# Altium PCB PCB1.PcbDoc
Units mil, origin at the board's own origin, x right, y up, seen from the top; angles counter-clockwise.
Board outline 6000 x 4000 mil, 2 copper layers (Top Layer, Bottom Layer); 1 components, 0 nets, 402 pads, 0 vias.
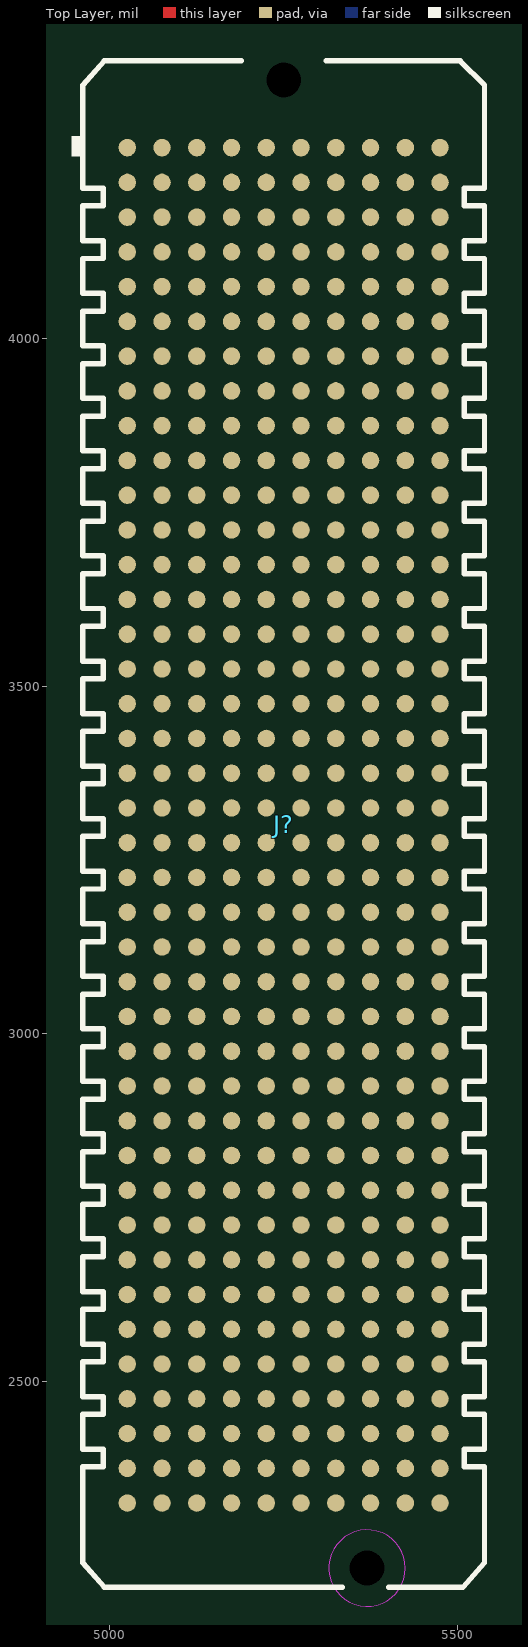
[diagram p0: Top Layer view]
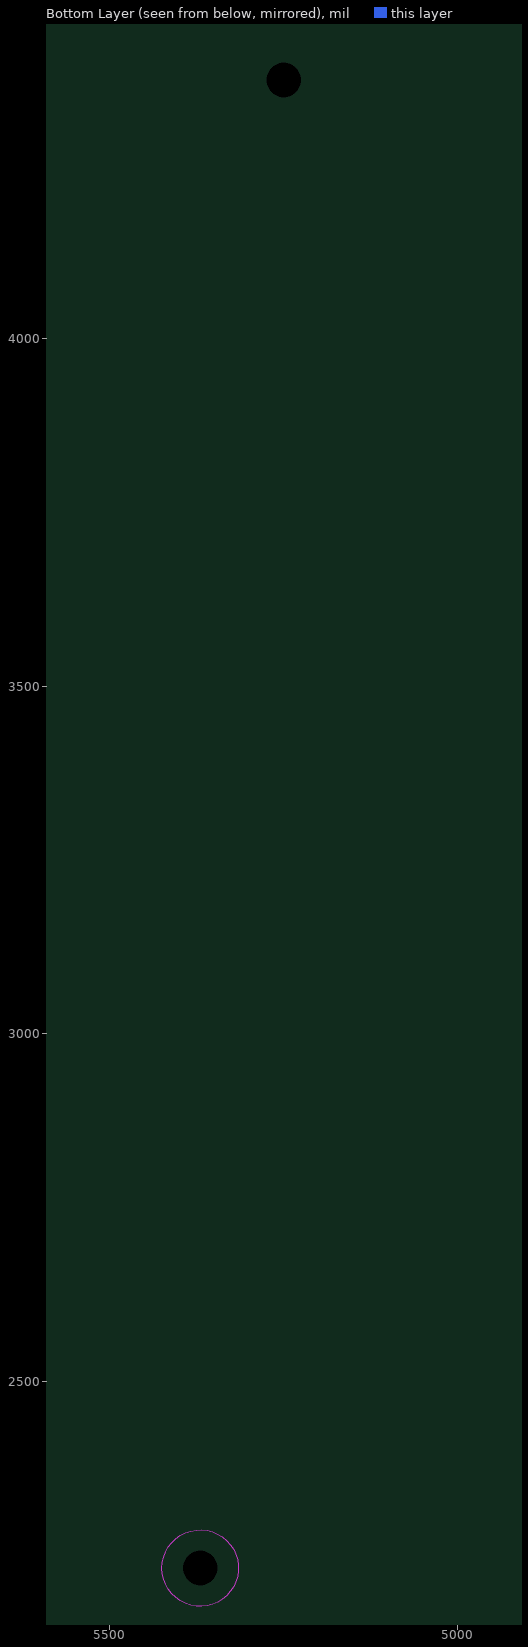
[diagram p1: Bottom Layer view, seen from below]

## Layer stack, top to bottom
Top Solder: solder mask 0.4, Solder Resist, Dk 3.5
Top Layer: signal copper 1.4
Dielectric 1: dielectric 12.6, FR-4, Dk 4.8
Bottom Layer: signal copper 1.4
Bottom Solder: solder mask 0.4, Solder Resist, Dk 3.5

## Board outline
1000,1000 7000,1000 7000,5000 1000,5000

## Design rules (kind name [scope] priority, off if disabled: settings)
Clearance [All] p1: gap=10 ignorepadtopadclearanceinfootprint=FALSE except(0: Arc-Hole Track-Hole SMDPad-Hole THPad-Hole Via-Hole Fill-Hole Poly-Hole Region-Hole Text-Hole)
PolygonConnect [All] p1: connectstyle=Relief reliefconductorwidth=10 reliefentries=4 polygonreliefangle="90 Angle" airgapwidth=10
RoutingVias [All] p1: holewidth=28 width=50 viastyle="Through Hole" minholewidth=28 minwidth=50 maxholewidth=28 maxwidth=50
SolderMaskExpansion [All] p1: expansion=4
Width [All] p1: maxlimit=10 minlimit=10 preferedwidth=10
30 further rules are at their usual default settings.

## Components (designator, comment, footprint, x,y, rotation, side; value= is the part's Value field where it differs from the comment)
J? "ASP-134602-01" SAMTEC_ASP-134602-01 5250,3301.94 r0 top

## Footprints (in the part's own frame and the unit in brackets; to place one, negate y for a bottom-side part, rotate by r counter-clockwise, add the part's x,y. Pads: shape width x height; smd on the part's side, far side on the other; paste and mask are expansions set on the pad)
SAMTEC_ASP-134602-01 [mm] "Connector,  Male, 1.27 mm, 40x4, SMD"
  round 0.635 hole 1.27 unplated mask+0.572: 401(0,27.191) 402(3.048,-27.191)
  round 0.64 smd paste+0.125 mask+0.05: A1(-5.715,24.716) A2(-5.715,23.446) A3(-5.715,22.176) A4(-5.715,20.906) A5(-5.715,19.636) A6(-5.715,18.366) A7(-5.715,17.096) A8(-5.715,15.826) A9(-5.715,14.556) A10(-5.715,13.286) A11(-5.715,12.016) A12(-5.715,10.746) A13(-5.715,9.476) A14(-5.715,8.206) A15(-5.715,6.936) A16(-5.715,5.666) A17(-5.715,4.396) A18(-5.715,3.126) A19(-5.715,1.856) A20(-5.715,0.586) A21(-5.715,-0.684) A22(-5.715,-1.954) A23(-5.715,-3.224) A24(-5.715,-4.494) A25(-5.715,-5.764) A26(-5.715,-7.034) A27(-5.715,-8.304) A28(-5.715,-9.574) A29(-5.715,-10.844) A30(-5.715,-12.114) A31(-5.715,-13.384) A32(-5.715,-14.654) A33(-5.715,-15.924) A34(-5.715,-17.194) A35(-5.715,-18.464) A36(-5.715,-19.734) A37(-5.715,-21.004) A38(-5.715,-22.274) A39(-5.715,-23.544) A40(-5.715,-24.814) B1(-4.445,24.716) B2(-4.445,23.446) B3(-4.445,22.176) B4(-4.445,20.906) B5(-4.445,19.636) B6(-4.445,18.366) B7(-4.445,17.096) B8(-4.445,15.826) B9(-4.445,14.556) B10(-4.445,13.286) B11(-4.445,12.016) B12(-4.445,10.746) B13(-4.445,9.476) B14(-4.445,8.206) B15(-4.445,6.936) B16(-4.445,5.666) B17(-4.445,4.396) B18(-4.445,3.126) B19(-4.445,1.856) B20(-4.445,0.586) B21(-4.445,-0.684) B22(-4.445,-1.954) B23(-4.445,-3.224) B24(-4.445,-4.494) B25(-4.445,-5.764) B26(-4.445,-7.034) B27(-4.445,-8.304) B28(-4.445,-9.574) B29(-4.445,-10.844) B30(-4.445,-12.114) B31(-4.445,-13.384) B32(-4.445,-14.654) B33(-4.445,-15.924) B34(-4.445,-17.194) B35(-4.445,-18.464) B36(-4.445,-19.734) B37(-4.445,-21.004) B38(-4.445,-22.274) B39(-4.445,-23.544) B40(-4.445,-24.814) C1(-3.175,24.716) C2(-3.175,23.446) C3(-3.175,22.176) C4(-3.175,20.906) C5(-3.175,19.636) C6(-3.175,18.366) C7(-3.175,17.096) C8(-3.175,15.826) C9(-3.175,14.556) C10(-3.175,13.286) C11(-3.175,12.016) C12(-3.175,10.746) C13(-3.175,9.476) C14(-3.175,8.206) C15(-3.175,6.936) C16(-3.175,5.666) C17(-3.175,4.396) C18(-3.175,3.126) C19(-3.175,1.856) C20(-3.175,0.586) C21(-3.175,-0.684) C22(-3.175,-1.954) C23(-3.175,-3.224) C24(-3.175,-4.494) C25(-3.175,-5.764) C26(-3.175,-7.034) C27(-3.175,-8.304) C28(-3.175,-9.574) C29(-3.175,-10.844) C30(-3.175,-12.114) C31(-3.175,-13.384) C32(-3.175,-14.654) C33(-3.175,-15.924) C34(-3.175,-17.194) C35(-3.175,-18.464) C36(-3.175,-19.734) C37(-3.175,-21.004) C38(-3.175,-22.274) C39(-3.175,-23.544) C40(-3.175,-24.814) D1(-1.905,24.716) D2(-1.905,23.446) D3(-1.905,22.176) D4(-1.905,20.906) D5(-1.905,19.636) D6(-1.905,18.366) D7(-1.905,17.096) D8(-1.905,15.826) D9(-1.905,14.556) D10(-1.905,13.286) D11(-1.905,12.016) D12(-1.905,10.746) D13(-1.905,9.476) D14(-1.905,8.206) D15(-1.905,6.936) D16(-1.905,5.666) D17(-1.905,4.396) D18(-1.905,3.126) D19(-1.905,1.856) D20(-1.905,0.586) D21(-1.905,-0.684) D22(-1.905,-1.954) D23(-1.905,-3.224) D24(-1.905,-4.494) D25(-1.905,-5.764) D26(-1.905,-7.034) D27(-1.905,-8.304) D28(-1.905,-9.574) D29(-1.905,-10.844) D30(-1.905,-12.114) D31(-1.905,-13.384) D32(-1.905,-14.654) D33(-1.905,-15.924) D34(-1.905,-17.194) D35(-1.905,-18.464) D36(-1.905,-19.734) D37(-1.905,-21.004) D38(-1.905,-22.274) D39(-1.905,-23.544) D40(-1.905,-24.814) E1(-0.635,24.716) E2(-0.635,23.446) E3(-0.635,22.176) E4(-0.635,20.906) E5(-0.635,19.636) E6(-0.635,18.366) E7(-0.635,17.096) E8(-0.635,15.826) E9(-0.635,14.556) E10(-0.635,13.286) E11(-0.635,12.016) E12(-0.635,10.746) E13(-0.635,9.476) E14(-0.635,8.206) E15(-0.635,6.936) E16(-0.635,5.666) E17(-0.635,4.396) E18(-0.635,3.126) E19(-0.635,1.856) E20(-0.635,0.586) E21(-0.635,-0.684) E22(-0.635,-1.954) E23(-0.635,-3.224) E24(-0.635,-4.494) E25(-0.635,-5.764) E26(-0.635,-7.034) E27(-0.635,-8.304) E28(-0.635,-9.574) E29(-0.635,-10.844) E30(-0.635,-12.114) E31(-0.635,-13.384) E32(-0.635,-14.654) E33(-0.635,-15.924) E34(-0.635,-17.194) E35(-0.635,-18.464) E36(-0.635,-19.734) E37(-0.635,-21.004) E38(-0.635,-22.274) E39(-0.635,-23.544) E40(-0.635,-24.814) F1(0.635,24.716) F2(0.635,23.446) F3(0.635,22.176) F4(0.635,20.906) F5(0.635,19.636) F6(0.635,18.366) F7(0.635,17.096) F8(0.635,15.826) F9(0.635,14.556) F10(0.635,13.286) F11(0.635,12.016) F12(0.635,10.746) F13(0.635,9.476) F14(0.635,8.206) F15(0.635,6.936) F16(0.635,5.666) F17(0.635,4.396) F18(0.635,3.126) F19(0.635,1.856) F20(0.635,0.586) F21(0.635,-0.684) F22(0.635,-1.954) F23(0.635,-3.224) F24(0.635,-4.494) F25(0.635,-5.764) F26(0.635,-7.034) F27(0.635,-8.304) F28(0.635,-9.574) F29(0.635,-10.844) F30(0.635,-12.114) F31(0.635,-13.384) F32(0.635,-14.654) F33(0.635,-15.924) F34(0.635,-17.194) F35(0.635,-18.464) F36(0.635,-19.734) F37(0.635,-21.004) F38(0.635,-22.274) F39(0.635,-23.544) F40(0.635,-24.814) G1(1.905,24.716) G2(1.905,23.446) G3(1.905,22.176) G4(1.905,20.906) G5(1.905,19.636) G6(1.905,18.366) G7(1.905,17.096) G8(1.905,15.826) G9(1.905,14.556) G10(1.905,13.286) G11(1.905,12.016) G12(1.905,10.746) G13(1.905,9.476) G14(1.905,8.206) G15(1.905,6.936) G16(1.905,5.666) G17(1.905,4.396) G18(1.905,3.126) G19(1.905,1.856) G20(1.905,0.586) G21(1.905,-0.684) G22(1.905,-1.954) G23(1.905,-3.224) G24(1.905,-4.494) G25(1.905,-5.764) G26(1.905,-7.034) G27(1.905,-8.304) G28(1.905,-9.574) G29(1.905,-10.844) G30(1.905,-12.114) G31(1.905,-13.384) G32(1.905,-14.654) G33(1.905,-15.924) G34(1.905,-17.194) G35(1.905,-18.464) G36(1.905,-19.734) G37(1.905,-21.004) G38(1.905,-22.274) G39(1.905,-23.544) G40(1.905,-24.814) H1(3.175,24.716) H2(3.175,23.446) H3(3.175,22.176) H4(3.175,20.906) H5(3.175,19.636) H6(3.175,18.366) H7(3.175,17.096) H8(3.175,15.826) H9(3.175,14.556) H10(3.175,13.286) H11(3.175,12.016) H12(3.175,10.746) H13(3.175,9.476) H14(3.175,8.206) H15(3.175,6.936) H16(3.175,5.666) H17(3.175,4.396) H18(3.175,3.126) H19(3.175,1.856) H20(3.175,0.586) H21(3.175,-0.684) H22(3.175,-1.954) H23(3.175,-3.224) H24(3.175,-4.494) H25(3.175,-5.764) H26(3.175,-7.034) H27(3.175,-8.304) H28(3.175,-9.574) H29(3.175,-10.844) H30(3.175,-12.114) H31(3.175,-13.384) H32(3.175,-14.654) H33(3.175,-15.924) H34(3.175,-17.194) H35(3.175,-18.464) H36(3.175,-19.734) H37(3.175,-21.004) H38(3.175,-22.274) H39(3.175,-23.544) H40(3.175,-24.814) J1(4.445,24.716) J2(4.445,23.446) J3(4.445,22.176) J4(4.445,20.906) J5(4.445,19.636) J6(4.445,18.366) J7(4.445,17.096) J8(4.445,15.826) J9(4.445,14.556) J10(4.445,13.286) J11(4.445,12.016) J12(4.445,10.746) J13(4.445,9.476) J14(4.445,8.206) J15(4.445,6.936) J16(4.445,5.666) J17(4.445,4.396) J18(4.445,3.126) J19(4.445,1.856) J20(4.445,0.586) J21(4.445,-0.684) J22(4.445,-1.954) J23(4.445,-3.224) J24(4.445,-4.494) J25(4.445,-5.764) J26(4.445,-7.034) J27(4.445,-8.304) J28(4.445,-9.574) J29(4.445,-10.844) J30(4.445,-12.114) J31(4.445,-13.384) J32(4.445,-14.654) J33(4.445,-15.924) J34(4.445,-17.194) J35(4.445,-18.464) J36(4.445,-19.734) J37(4.445,-21.004) J38(4.445,-22.274) J39(4.445,-23.544) J40(4.445,-24.814) K1(5.715,24.716) K2(5.715,23.446) K3(5.715,22.176) K4(5.715,20.906) K5(5.715,19.636) K6(5.715,18.366) K7(5.715,17.096) K8(5.715,15.826) K9(5.715,14.556) K10(5.715,13.286) K11(5.715,12.016) K12(5.715,10.746) K13(5.715,9.476) K14(5.715,8.206) K15(5.715,6.936) K16(5.715,5.666) K17(5.715,4.396) K18(5.715,3.126) K19(5.715,1.856) K20(5.715,0.586) K21(5.715,-0.684) K22(5.715,-1.954) K23(5.715,-3.224) K24(5.715,-4.494) K25(5.715,-5.764) K26(5.715,-7.034) K27(5.715,-8.304) K28(5.715,-9.574) K29(5.715,-10.844) K30(5.715,-12.114) K31(5.715,-13.384) K32(5.715,-14.654) K33(5.715,-15.924) K34(5.715,-17.194) K35(5.715,-18.464) K36(5.715,-19.734) K37(5.715,-21.004) K38(5.715,-22.274) K39(5.715,-23.544) K40(5.715,-24.814)
  Keep-Out Layer circle w0: c3.05,-27.19 r1.397
  silkscreen extent -7.75,-27.89 7.34,27.89, body extent -7.34,-27.89 7.34,28.78, height 5.61

## Part data
J?: "Connector, Male, 1.27 mm, 40x4, SMD", Manufacturer=Samtec, Supplier Part Number 1=SAM8731-ND, ComponentLink1Description="Datasheet Link", ComponentLink1URL=http://www.samtec.com/documents/webfiles/Cpdf/ASP-134602-01-mkt.pdf, Component Type=Standard, CompType=Connector, LatestRevisionDate=2015-05-09, MountType=SMT, PackageReference="Connector, Male, 1.27 mm, 40x4, SMD", Part Number=ASP-134602-01, PartNumber=ASP-134602-01, Pin Count=400, Publisher="Texas Instruments", RoHS=Y, Supplier 1=Digi-Key, SymbolCreator=Altium, SymbolVersion=2014-08-21, U/M=EA

## Nets (pads, with @x,y where several pads share a name; then routed paths per layer and width w, separated by ;. In a path a pad name is that pad's centre, name@x,y a point inside that pad or via, vN(x,y) a via of type N, cw(c..) or ccw(c..) an arc to the next point about the centre after c; other vN are vias at no path point)
pads on no net: J?.401 J?.402 J?.A1 J?.A2 J?.A3 J?.A4 J?.A5 J?.A6 J?.A7 J?.A8 J?.A9 J?.A10 J?.A11 J?.A12 J?.A13 J?.A14 J?.A15 J?.A16 J?.A17 J?.A18 J?.A19 J?.A20 J?.A21 J?.A22 J?.A23 J?.A24 J?.A25 J?.A26 J?.A27 J?.A28 J?.A29 J?.A30 J?.A31 J?.A32 J?.A33 J?.A34 J?.A35 J?.A36 J?.A37 J?.A38 J?.A39 J?.A40 J?.B1 J?.B2 J?.B3 J?.B4 J?.B5 J?.B6 J?.B7 J?.B8 J?.B9 J?.B10 J?.B11 J?.B12 J?.B13 J?.B14 J?.B15 J?.B16 J?.B17 J?.B18 J?.B19 J?.B20 J?.B21 J?.B22 J?.B23 J?.B24 J?.B25 J?.B26 J?.B27 J?.B28 J?.B29 J?.B30 J?.B31 J?.B32 J?.B33 J?.B34 J?.B35 J?.B36 J?.B37 J?.B38 J?.B39 J?.B40 J?.C1 J?.C2 J?.C3 J?.C4 J?.C5 J?.C6 J?.C7 J?.C8 J?.C9 J?.C10 J?.C11 J?.C12 J?.C13 J?.C14 J?.C15 J?.C16 J?.C17 J?.C18 J?.C19 J?.C20 J?.C21 J?.C22 J?.C23 J?.C24 J?.C25 J?.C26 J?.C27 J?.C28 J?.C29 J?.C30 J?.C31 J?.C32 J?.C33 J?.C34 J?.C35 J?.C36 J?.C37 J?.C38 J?.C39 J?.C40 J?.D1 J?.D2 J?.D3 J?.D4 J?.D5 J?.D6 J?.D7 J?.D8 J?.D9 J?.D10 J?.D11 J?.D12 J?.D13 J?.D14 J?.D15 J?.D16 J?.D17 J?.D18 J?.D19 J?.D20 J?.D21 J?.D22 J?.D23 J?.D24 J?.D25 J?.D26 J?.D27 J?.D28 J?.D29 J?.D30 J?.D31 J?.D32 J?.D33 J?.D34 J?.D35 J?.D36 J?.D37 J?.D38 J?.D39 J?.D40 J?.E1 J?.E2 J?.E3 J?.E4 J?.E5 J?.E6 J?.E7 J?.E8 J?.E9 J?.E10 J?.E11 J?.E12 J?.E13 J?.E14 J?.E15 J?.E16 J?.E17 J?.E18 J?.E19 J?.E20 J?.E21 J?.E22 J?.E23 J?.E24 J?.E25 J?.E26 J?.E27 J?.E28 J?.E29 J?.E30 J?.E31 J?.E32 J?.E33 J?.E34 J?.E35 J?.E36 J?.E37 J?.E38 J?.E39 J?.E40 J?.F1 J?.F2 J?.F3 J?.F4 J?.F5 J?.F6 J?.F7 J?.F8 J?.F9 J?.F10 J?.F11 J?.F12 J?.F13 J?.F14 J?.F15 J?.F16 J?.F17 J?.F18 J?.F19 J?.F20 J?.F21 J?.F22 J?.F23 J?.F24 J?.F25 J?.F26 J?.F27 J?.F28 J?.F29 J?.F30 J?.F31 J?.F32 J?.F33 J?.F34 J?.F35 J?.F36 J?.F37 J?.F38 J?.F39 J?.F40 J?.G1 J?.G2 J?.G3 J?.G4 J?.G5 J?.G6 J?.G7 J?.G8 J?.G9 J?.G10 J?.G11 J?.G12 J?.G13 J?.G14 J?.G15 J?.G16 J?.G17 J?.G18 J?.G19 J?.G20 J?.G21 J?.G22 J?.G23 J?.G24 J?.G25 J?.G26 J?.G27 J?.G28 J?.G29 J?.G30 J?.G31 J?.G32 J?.G33 J?.G34 J?.G35 J?.G36 J?.G37 J?.G38 J?.G39 J?.G40 J?.H1 J?.H2 J?.H3 J?.H4 J?.H5 J?.H6 J?.H7 J?.H8 J?.H9 J?.H10 J?.H11 J?.H12 J?.H13 J?.H14 J?.H15 J?.H16 J?.H17 J?.H18 J?.H19 J?.H20 J?.H21 J?.H22 J?.H23 J?.H24 J?.H25 J?.H26 J?.H27 J?.H28 J?.H29 J?.H30 J?.H31 J?.H32 J?.H33 J?.H34 J?.H35 J?.H36 J?.H37 J?.H38 J?.H39 J?.H40 J?.J1 J?.J2 J?.J3 J?.J4 J?.J5 J?.J6 J?.J7 J?.J8 J?.J9 J?.J10 J?.J11 J?.J12 J?.J13 J?.J14 J?.J15 J?.J16 J?.J17 J?.J18 J?.J19 J?.J20 J?.J21 J?.J22 J?.J23 J?.J24 J?.J25 J?.J26 J?.J27 J?.J28 J?.J29 J?.J30 J?.J31 J?.J32 J?.J33 J?.J34 J?.J35 J?.J36 J?.J37 J?.J38 J?.J39 J?.J40 J?.K1 J?.K2 J?.K3 J?.K4 J?.K5 J?.K6 J?.K7 J?.K8 J?.K9 J?.K10 J?.K11 J?.K12 J?.K13 J?.K14 J?.K15 J?.K16 J?.K17 J?.K18 J?.K19 J?.K20 J?.K21 J?.K22 J?.K23 J?.K24 J?.K25 J?.K26 J?.K27 J?.K28 J?.K29 J?.K30 J?.K31 J?.K32 J?.K33 J?.K34 J?.K35 J?.K36 J?.K37 J?.K38 J?.K39 J?.K40

## Text inside footprints (layer, text, board x,y; h text height)
J?: Mechanical 5 "A1" at 4930,4276.94 h40 r90